# Altium PCB PCB1.PcbDoc
Units mm, origin at the board's own origin, x right, y up, seen from the top; angles counter-clockwise.
Board outline 75 x 55 mm, 2 copper layers (Top Layer, Bottom Layer); 36 components, 22 nets, 124 pads, 84 vias.
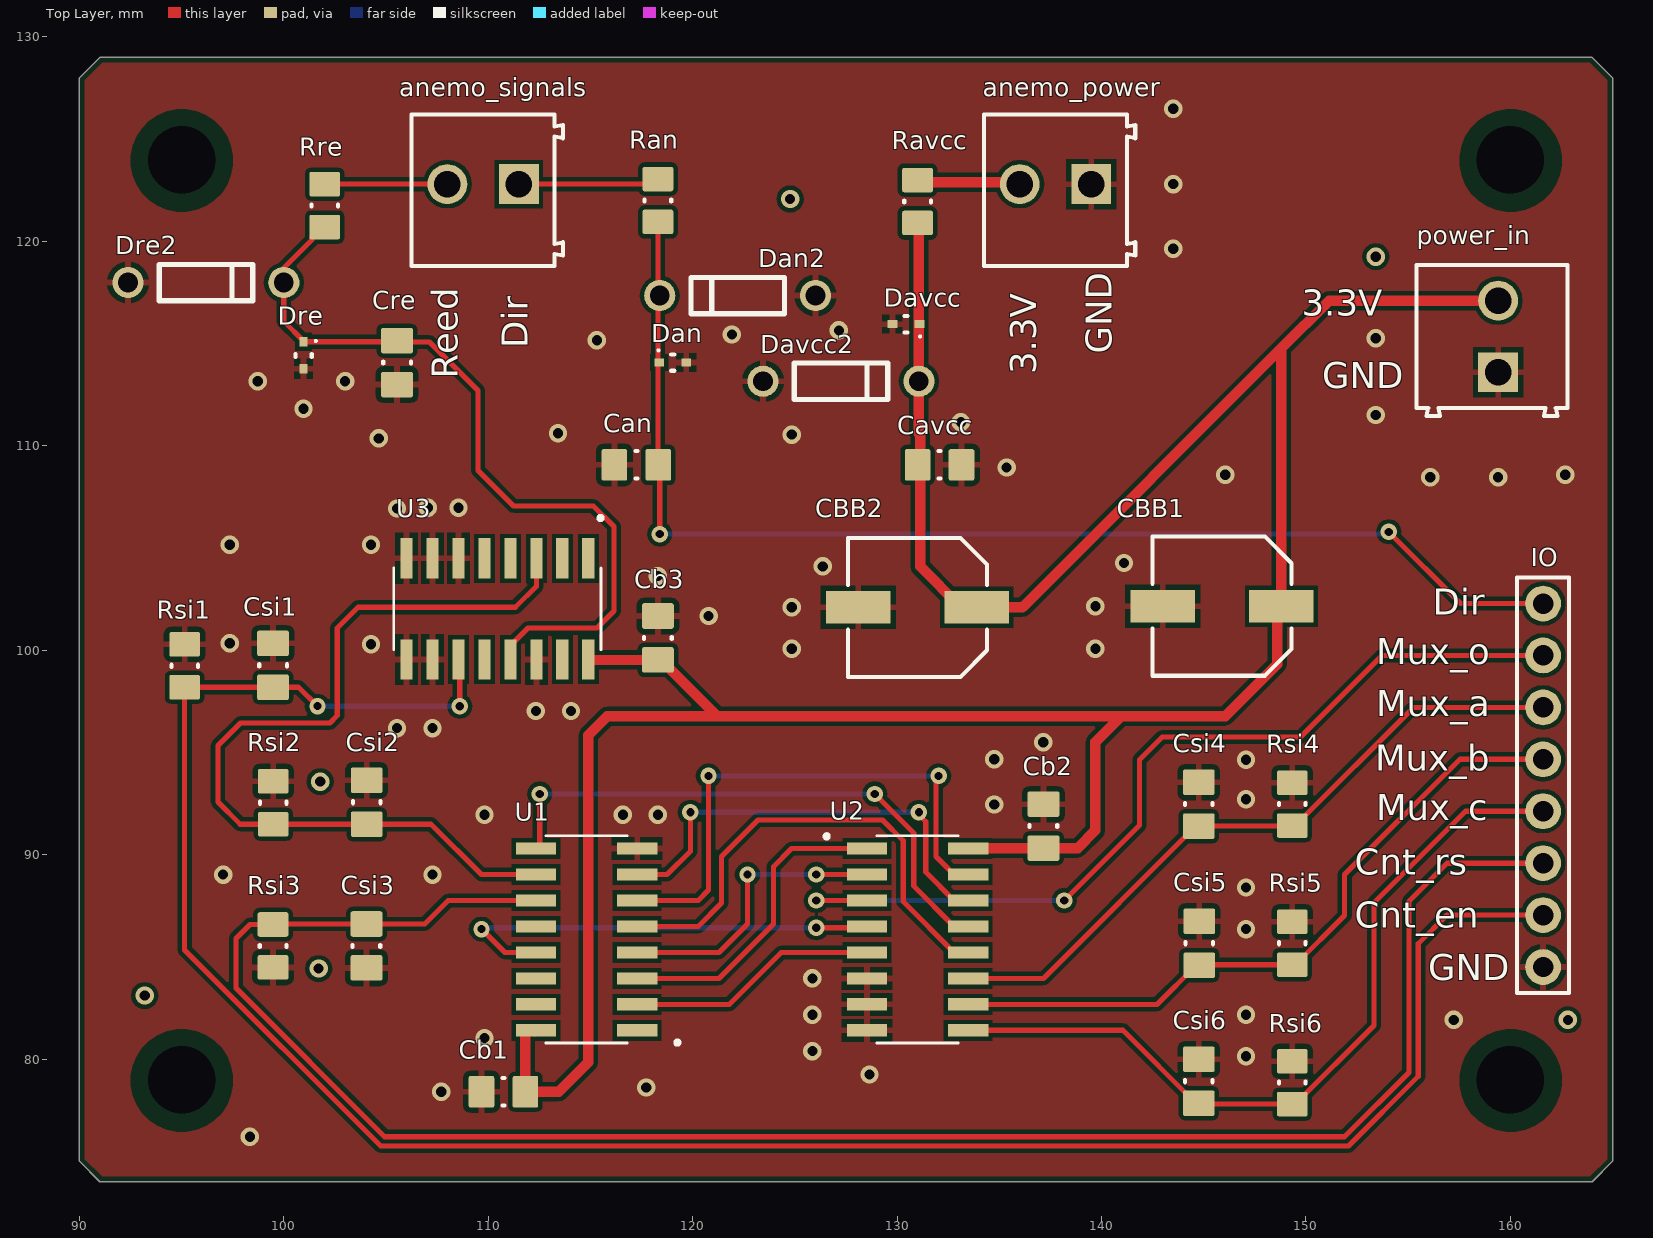
[diagram p0: Top Layer view]
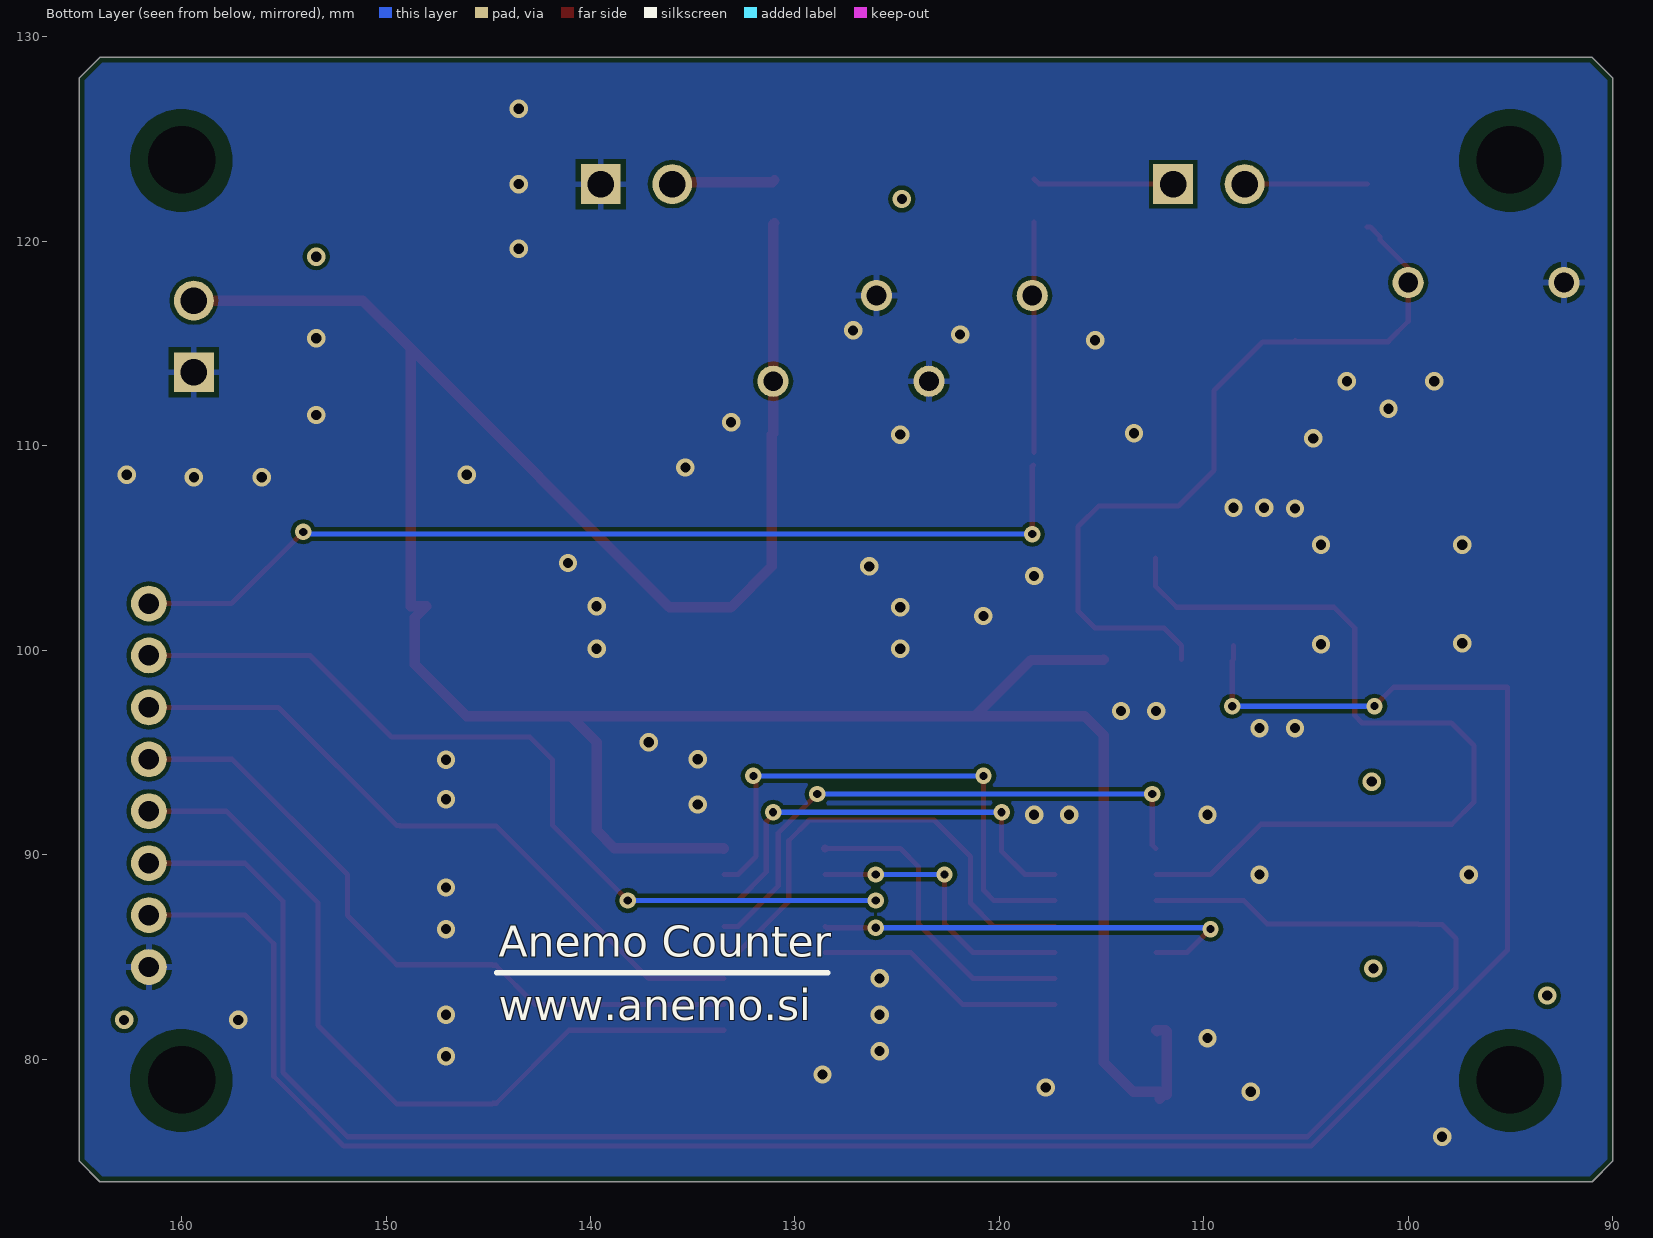
[diagram p1: Bottom Layer view, seen from below]

## Layer stack, top to bottom
Top Solder: solder mask 0.0102, Solder Resist, Dk 3.5
Top Layer: signal copper 0.0356
Dielectric 1: dielectric 0.32, FR-4, Dk 4.8
Bottom Layer: signal copper 0.0356
Bottom Solder: solder mask 0.0102, Solder Resist, Dk 3.5

## Board outline
90,75 91,74 164,74 165,75 165,128 164,129 91,129 90,128

## Design rules (kind name [scope] priority, off if disabled: settings)
BoardOutlineClearance [All] p1: gap=0.254 ignorepadtopadclearanceinfootprint=FALSE except(0: Arc-SplitContinuation Track-SplitContinuation SMDPad-SplitContinuation THPad-SplitContinuation Via-SplitContinuation Fill-SplitContinuation Poly-SplitContinuation Region-SplitContinuation Text-SplitContinuation)
Clearance Clearance_GND [(InNamedPolygon('Bottom Layer-No Net'))] p1: gap=0.254 ignorepadtopadclearanceinfootprint=FALSE except(0: Arc-Hole Track-Hole SMDPad-Hole THPad-Hole Via-Hole Fill-Hole Poly-Hole Region-Hole Text-Hole)
Clearance [All] p2: gap=0.203 ignorepadtopadclearanceinfootprint=FALSE
Height [All] p1: minheight=-1 maxheight=50 prefheight=12.7
HoleSize [All] p1: absolutevalues=TRUE maxlimit=6.3 minlimit=0.2 maxpercent=80.000 minpercent=20.000
HoleToHoleClearance [All] p1: gap=0.203 allowstackedmicrovias=TRUE
MinimumAnnularRing [All] p1: minimumring=0.127
MinimumSolderMaskSliver [All] p1: minsoldermaskwidth=0.076
PolygonConnect PolygonConnect_via [IsVia] p1: connectstyle=Direct reliefconductorwidth=0.254 reliefentries=4 polygonreliefangle="90 Angle" airgapwidth=0.254
PolygonConnect [All] p2: connectstyle=Relief reliefconductorwidth=0.305 reliefentries=4 polygonreliefangle="90 Angle" airgapwidth=0.254
RoutingVias [All] p1: holewidth=0.5 width=0.9 viastyle="Through Hole" minholewidth=0.4 minwidth=0.8 maxholewidth=0.7 maxwidth=1.2
ShortCircuit ShortCircuit_GND [InNet('AGND') OR InNet('GND') OR InNet('QGND') OR InNet('REF_GND') vs InNet('AGND') OR InNet('GND') OR InNet('QGND') OR InNet('REF_GND')] p1: allowed=TRUE
ShortCircuit [All] p2: allowed=FALSE
SilkToSilkClearance [All] p1: silktosilkclearance=0.102
SilkToSolderMaskClearance SilkscreenOverComponentPads [IsPad] p1: minsilkscreentomaskgap=0.05 clearancetoexposedcopper=TRUE
SolderMaskExpansion [All] p1: expansion=0.102
Width [All] p1: maxlimit=0.508 minlimit=0.254 preferedwidth=0.381
23 further rules are at their usual default settings.

## Components (designator, comment, footprint, x,y, rotation, side; value= is the part's Value field where it differs from the comment)
anemo_power "691214110002" 691214110002 137.75,122.5 r180 top
anemo_signals "691214110002" 691214110002 109.75,122.5 r180 top
Can "1nF" C0805(2012)_M 117.246,109.068 r180 top
Cavcc "1nF" C0805(2012)_M 132.075,109.068 r0 top
Cb1 "100nF" C0805(2012)_M 110.744,78.4 r180 top
Cb2 "100nF" C0805(2012)_M 137.16,91.397 r90 top
Cb3 "100nF" C0805(2012)_M 118.3,100.6 r90 top
CBB1 "10uF" C-SMD-ELKO-D 145.9,102.154 r180 top (schematic designator Cbb1)
CBB2 "100uF" C-SMD-ELKO-D 131,102.1 r180 top (schematic designator Cbb2)
Cre "1nF" C0805(2012)_M 105.537,114.071 r270 top
Csi1 "100pF" C0805(2012)_M 99.472,99.264 r90 top
Csi2 "100pF" C0805(2012)_M 104.053,92.567 r90 top
Csi3 "100pF" C0805(2012)_M 104.044,85.534 r270 top
Csi4 "100pF" C0805(2012)_M 144.758,92.472 r90 top
Csi5 "100pF" C0805(2012)_M 144.783,85.668 r90 top
Csi6 "100pF" C0805(2012)_M 144.758,78.918 r90 top
Dan "ESD5Z3.3T1G" ONSC-SOD-523-2-502-01_V 119.024,114.071 r0 top
Dan2 "BZX85C3V3" "DO 35 (300MILS)" 126.009,117.348 r180 top
Davcc "ESD5Z3.3T1G" ONSC-SOD-523-2-502-01_V 130.429,115.951 r180 top
Davcc2 "BZX85C3V3" "DO 35 (300MILS)" 123.444,113.157 r0 top
Dre "ESD5Z3.3T1G" ONSC-SOD-523-2-502-01_V 100.965,114.427 r270 top
Dre2 "BZX85C3V3" "DO 35 (300MILS)" 92.38,117.983 r0 top
IO "H1x8" H1x8 161.6,102.284 r90 top
power_in "691214110002" 691214110002 159.1,115.35 r90 top
Ran "220" R0805(2012)_M 118.3,122 r270 top
Ravcc "2.2" R0805(2012)_M 131,121.95 r270 top
Rre "220" R0805(2012)_M 102,121.75 r270 top
Rsi1 "10k" R0805(2012)_M 95.148,99.239 r90 top
Rsi2 "10k" R0805(2012)_M 99.481,92.542 r90 top
Rsi3 "10k" R0805(2012)_M 99.472,85.534 r270 top
Rsi4 "10k" R0805(2012)_M 149.33,92.472 r90 top
Rsi5 "10k" R0805(2012)_M 149.33,85.668 r90 top
Rsi6 "10k" R0805(2012)_M 149.33,78.848 r90 top
U1 "CD4040BE" *SOIC16 114.808,85.852 r180 top
U2 "CD4051BE" *SOIC16 130.999,85.852 r0 top
U3 "CD4051BE" *SOIC16 110.45,102.021 r270 top

## Footprints (in the part's own frame and the unit in brackets; to place one, negate y for a bottom-side part, rotate by r counter-clockwise, add the part's x,y. Pads: shape width x height; smd on the part's side, far side on the other; paste and mask are expansions set on the pad)
691214110002 [mm] "3.50 mm Horizontal Entry Modular, 2p"
  rect 1.95x1.95 hole 1.3: 1(-1.75,-0.3)
  round 1.95 hole 1.3: 2(1.75,-0.3)
  silkscreen extent -3.9,-3.7 3.5,3.7, body extent -3.95,-3.7 3.5,3.7, height 8.55
*SOIC16 [mm]
  rect 1.97x0.6 smd: 1(-2.475,4.445) 2(-2.475,3.175) 3(-2.475,1.905) 4(-2.475,0.635) 5(-2.475,-0.635) 6(-2.475,-1.905) 7(-2.475,-3.175) 8(-2.475,-4.445) 9(2.475,-4.445) 10(2.475,-3.175) 11(2.475,-1.905) 12(2.475,-0.635) 13(2.475,0.635) 14(2.475,1.905) 15(2.475,3.175) 16(2.475,4.445)
  silkscreen extent -4.54,-5.06 2,5.14
C0805(2012)_M [mm] "Chip Capacitor, 2-Leads, Body 2.05x1.25mm, IPC Low Density"
  rrect15% 1.25x1.55 smd: 1(-1.075,0) 2(1.075,0)
  silkscreen extent -0.05,-0.67 0.05,0.67, body extent -1.1,-0.7 1.1,0.7, height 1.4
C-SMD-ELKO-D [mm] "Aluminum Electrolytic Capacitor, Body 6.60x6.60x6.10mm, IPC Medium Density"
  rect 3.15x1.6 smd: 1(-2.9,0) 2(2.9,0)
  silkscreen extent -3.4,-3.4 3.4,3.4, body extent -3.5,-3.3 3.5,3.3, height 5.4
"DO 35 (300MILS)" [mil]
  round 60 hole 38: A(0,0) K(300,0)
  silkscreen extent 60,-35 240,35, body extent 3,-40 299,38, height 79
H1x8 [mm]
  round 1.75 hole 1: 1(0,0) 2(-2.54,0) 3(-5.08,0) 4(-7.62,0) 5(-10.16,0) 6(-12.7,0) 7(-15.24,0) 8(-17.78,0)
  silkscreen extent -19.05,-1.27 1.27,1.27, body extent -19.05,-1.27 1.27,1.27, height 8.4
ONSC-SOD-523-2-502-01_V [mm] "SOD, 2-Leads, Body 1.2x0.8mm"
  rect 0.48x0.4 smd: 1(-0.66,0) 2(0.66,0)
  silkscreen extent -0.75,-0.4 0.07,0.65, body extent -0.6,-0.4 0.6,0.4, height 0.7
R0805(2012)_M [mm] "Chip Resistor, 2-Leads, Body 2.05x1.25mm, IPC Low Density"
  rrect15% 1.2x1.5 smd: 1(-1.05,0) 2(1.05,0)
  silkscreen extent -0.05,-0.65 0.05,0.65, body extent -1.1,-0.7 1.1,0.7, height 0.8

## Part data
anemo_power anemo_signals power_in: "Serie 2141 - 3.50 mm Horizontal Entry Modular with Rising Cage Clamp WR-TBL, 2 pin", Operating Temperature="-40 to 105 degC", ComponentLink1Description=Manufacturer, ComponentLink1URL=http://www.we-online.de, ComponentLink2Description=Datasheet, ComponentLink2URL=http://katalog.we-online.de/em/datasheet/6912141100xx.pdf, Mounting Technology=THT, Packaging=Box, Part Number=691214110002, Pin Number=2, Pitch="3.50 mm", Published Date="June 2018", Publisher="Wurth Elektronik"
Can Cavcc Cb1 Cb2 Cb3 Cre Csi1 Csi2 Csi3 Csi4 Csi5 Csi6: library part C, "Capacitor"
CBB1 CBB2: library part C+, "Capacitor Polarized"
Dan Davcc Dre: "Transient Voltage Suppressor, Micro-Packaged Diode for ESD Protection, 2-Pin SOD-523, Pb-Free, Tape and Reel", Manufacturer="On Semiconductor", Supplier Part Number 1=ESD5Z3.3T1GOSTR-ND, ComponentLink1Description="Manufacturer URL", ComponentLink1URL=http://www.onsemi.com/, ComponentLink2Description=Datasheet, ComponentLink2URL=http://www.onsemi.cn/pub_link/Collateral/ESD5Z2.5T1-D.PDF, ComponentLink3Description="Package Specification", ComponentLink3URL=http://www.onsemi.com/pub_link/Collateral/502-01.PDF, DatasheetVersion="Rev. 10", Direction=Unidirectional, IR Max (uA)=0.05, Mounting Technology="Surface Mount", Number of Lines=1, PackageDescription="2-Pin SOD, Body 1.2 x 0.8 mm", PackageReference=SOD-523-2-502-01, PackageVersion="Rev. E, 09/2010", Packing="Tape and Reel", PartNumber=ESD5Z3.3T1G, PPK Max (W)=158, RoHS=Pb-Free, Supplier 1=Digi-Key, Supplier 2=Digi-Key, Supplier 3=Digi-Key, Supplier 4=Farnell, Supplier 5=Farnell, Supplier 6=Newark, Supplier 7=Newark, Supplier 8=Mouser, Supplier Part Number 2=ESD5Z3.3T1GOSCT-ND, Supplier Part Number 3=ESD5Z3.3T1GOSDKR-ND, Supplier Part Number 4=2317508, Supplier Part Number 5=2317778, Supplier Part Number 6=41K9783, Supplier Part Number 7=10N9403, Supplier Part Number 8=863-ESD5Z3.3T1G, V(BR) Min (V)=5, VRWM Max (V)=3.3
IO: "Header 1x8 (male)"
Ran Ravcc Rre Rsi1 Rsi2 Rsi3 Rsi4 Rsi5 Rsi6: library part R, "R"
U1: "Ic Counter Ripple Binary 12 Stage 16dil-300", Package="PDIP-16 Texas Instruments", Availability=Unavailable, MF="Texas Instruments", MP=CD4040BE, Price=None, SnapEDA_Link=https://www.snapeda.com/parts/CD4040BE/Texas%20Instruments/view-part/?ref=snap
U2 U3: "i/c Analg Mx/Dmx 8chan 4051_p_", Package="DIP-16 Intersil", Availability=Unavailable, MF="Texas Instruments", MP=CD4051BE, Price=None, SnapEDA_Link=https://www.snapeda.com/parts/CD4051BE/Texas%20Instruments/view-part/?ref=snap

## Free pads (board coordinates)
  round 1.524 hole 3.3 unplated: 5(95,124) 5(95,79) 5(160,124) 5(160,79)

## Via types
v1: diameter 0.9, hole 0.5, Top Layer to Bottom Layer, 68 vias
v2: diameter 0.8, hole 0.4, Top Layer to Bottom Layer, 16 vias

## Nets (pads, with @x,y where several pads share a name; then routed paths per layer and width w, separated by ;. In a path a pad name is that pad's centre, name@x,y a point inside that pad or via, vN(x,y) a via of type N, cw(c..) or ccw(c..) an arc to the next point about the centre after c; other vN are vias at no path point)
anemo_analog: Can.1 Dan2.K Dan.1 IO.1 Ran.2 | length 59.5
  Top Layer w0.254: Can.1@118.3,109.677 Ran.2 ; Can.1 118.387,109.002 v2(118.387,105.681) ; v2(154.051,105.791) 157.558,102.284 IO.1
  Bottom Layer w0.254: v2@118.3,105.681 v2(118.387,105.681) 153.941,105.681 v2(154.051,105.791)
anemo_analog_raw: anemo_signals.1 Ran.1 | length 6.9
  Top Layer w0.254: anemo_signals.1 118.05,122.8 Ran.1
anemo_reed: Cre.1 Dre2.K Dre.1 Rre.2 U3.13 | length 39.8
  Top Layer w0.254: Rre.2 101.85,120.7 101.377,120.227 101.377,120.077 100,118.7 Dre2.K 100,116.092 100.965,115.127 Dre.1 104.488,115.087 ; Cre.1 105.477,115.087 104.488,115.087 ; U3.13 111.085,100.231 111.946,101.092 115.316,101.092 116.15,101.926 116.15,106.049 115.138,107.061 111.238,107.061 109.499,108.8 109.499,112.7 107.124,115.075 104.5,115.075 104.488,115.087
anemo_reed_raw: anemo_signals.2 Rre.1 | length 6
  Top Layer w0.254: Rre.1 anemo_signals.2
anemo_vcc: anemo_power.2 Ravcc.1 | length 5.1
  Top Layer w0.508: Ravcc.1 131.1,122.9 135.9,122.9 anemo_power.2
cnt_en: Csi1.1 IO.7 Rsi1.1 U3.11 | length 108.6
  Top Layer w0.254: v2(101.648,97.265) 100.724,98.189 Csi1.1 Rsi1.1 95.148,85.341 104.743,75.746 152.08,75.746 155.491,79.157 155.491,85.641 156.894,87.044 IO.7 ; U3.11@108.545,100.231 U3.11 108.61,99.481 v2(108.61,97.257)
  Bottom Layer w0.254: v2(101.648,97.265) 101.656,97.257 v2(108.61,97.257)
cnt_in: Csi2.1 Rsi2.1 U1.10 U3.3 | length 42.5
  Top Layer w0.254: U1.10 109.669,89.027 107.204,91.492 Csi2.1 Rsi2.1 97.865,91.492 96.774,92.583 96.774,95.337 97.881,96.444 102.255,96.444 102.616,96.805 102.616,101.092 103.624,102.1 111.325,102.1 112.355,103.13 U3.3
cnt_rst: Csi3.1 IO.6 Rsi3.1 U1.11 | length 95.3
  Top Layer w0.254: U1.11 108.045,87.757 106.897,86.609 Csi3.1 99.497,86.609 Rsi3.1 98.341,86.584 97.663,85.906 97.663,83.473 104.933,76.203 151.891,76.203 155.034,79.347 155.034,87.724 156.894,89.584 IO.6
GND: anemo_power.1 Can.2 Cavcc.2 Cb1.2 Cb2.2 Cb3.2 CBB1.2 CBB2.2 Cre.2 Csi1.2 Csi2.2 Csi3.2 Csi4.2 Csi5.2 Csi6.2 Dan2.A Dan.2 Davcc2.A Davcc.2 Dre2.A Dre.2 IO.8 power_in.1 Rsi1.2 Rsi2.2 Rsi3.2 Rsi4.2 Rsi5.2 Rsi6.2 U1.8 U2.6 U2.7 U2.8 U3.6 U3.7 U3.8 U3.9 U3.10 U3.14
  other v1: 98.341,76.2 107.696,78.4 117.729,78.613 128.651,79.248 147.066,80.137 125.857,80.391 109.815,81.026 157.226,81.915 125.857,82.169 147.066,82.169 125.857,83.947 147.066,86.36 147.066,88.392 97.028,89.027 107.275,89.027 109.815,91.948 116.586,91.948 118.3,91.948 134.747,92.456 147.066,92.71 147.066,94.646 134.747,94.664 137.148,95.504 105.537,96.19 107.275,96.19 112.333,97.028 114.046,97.028 124.841,100.076 139.7,100.076 104.267,100.289 97.358,100.339 120.777,101.675 124.841,102.1 139.7,102.154 118.3,103.632 126.365,104.1 141.097,104.267 97.358,105.156 104.267,105.156 105.537,106.934 107.048,106.974 108.545,106.974 156.083,108.458 159.4,108.458 146.05,108.585 162.687,108.585 135.357,108.941 104.648,110.363 124.841,110.55 113.411,110.612 133.121,111.15 153.416,111.506 100.965,111.811 98.73,113.157 102.997,113.157 115.316,115.16 153.416,115.265 121.92,115.443 127.152,115.646 143.51,119.634 143.51,122.8 143.51,126.492
mux_a: Csi4.1 IO.3 Rsi4.1 U2.11 | length 33.6
  Top Layer w0.254: U2.11 137.158,83.947 144.608,91.397 Csi4.1 149.305,91.397 Rsi4.1 149.48,91.422 155.262,97.204 IO.3
mux_b: Csi5.1 IO.4 Rsi5.1 U2.10 | length 34.3
  Top Layer w0.254: U2.10 142.717,82.677 144.633,84.593 Csi5.1 144.808,84.618 Rsi5.1 149.48,84.618 151.892,87.03 151.892,89.027 157.529,94.664 IO.4
mux_c: Csi6.1 IO.5 Rsi6.1 U2.9 | length 39.1
  Top Layer w0.254: U2.9 141.044,81.407 144.608,77.843 Csi6.1 144.803,77.798 Rsi6.1 149.48,77.798 153.329,81.648 153.329,87.651 157.802,92.124 IO.5
mux_out: IO.2 U2.3 | length 44.9
  Top Layer w0.254: v2(126.047,87.757) U2.3 ; v2(138.176,87.757) 141.859,91.44 141.859,94.646 142.971,95.758 149.733,95.758 153.719,99.744 IO.2
  Bottom Layer w0.254: v2(126.047,87.757) v2(138.176,87.757)
NetU1_2: U1.2 U2.5 | length 12.3
  Top Layer w0.254: U1.2 121.793,82.677 124.333,85.217 U2.5
NetU1_3: U1.3 U2.1 | length 15.5
  Top Layer w0.254: U1.3 121.285,83.947 123.952,86.614 123.952,89.408 124.841,90.297 128.499,90.297 U2.1@128.512,90.309
  Top Layer w0.381: U2.1@128.512,90.309 U2.1
NetU1_4: U1.4 U2.2 | length 14.2
  Top Layer w0.254: U1.4 121.285,85.217 122.682,86.614 v2(122.682,89.027) ; v2(126.047,89.027) U2.2
  Bottom Layer w0.254: v2(122.682,89.027) v2(126.047,89.027)
NetU1_5: U1.5 U2.12 | length 24.1
  Top Layer w0.254: U1.5 120.269,86.487 121.412,87.63 121.412,89.916 123.19,91.694 129.286,91.694 130.3,90.68 130.3,87.706 132.789,85.217 U2.12
NetU1_6: U1.6 U2.15 | length 26.5
  Top Layer w0.254: U1.6 120.269,87.757 120.777,88.265 v2(120.777,93.853) ; v2(132.029,93.853) 131.9,93.724 131.9,89.916 132.789,89.027 U2.15
  Bottom Layer w0.254: v2(120.777,93.853) v2(132.029,93.853)
NetU1_7: U1.7 U2.14 | length 21.9
  Top Layer w0.254: U1.7 118.748,89.027 119.888,90.167 v2(119.888,92.075) ; v2(131.064,92.075) 131.064,91.948 131.4,91.612 131.4,89.146 132.789,87.757 U2.14
  Bottom Layer w0.254: v2(119.888,92.075) v2(131.064,92.075)
NetU1_9: U1.9 U2.13 | length 27.9
  Top Layer w0.254: U1.9 112.349,90.297 112.522,90.47 v2(112.522,92.964) ; v2(128.905,92.964) 130.81,91.059 130.81,88.466 132.789,86.487 U2.13
  Bottom Layer w0.254: v2(112.522,92.964) v2(128.905,92.964)
NetU1_13: U1.13 U2.4 | length 22
  Top Layer w0.254: v2(109.669,86.36) 110.812,85.217 U1.13 ; v2(126.046,86.422) 126.047,86.423 128.46,86.423 U2.4
  Bottom Layer w0.254: v2(109.669,86.36) 109.731,86.422 v2(126.046,86.422)
VCC: Cavcc.1 Cb1.1 Cb2.1 Cb3.1 CBB1.1 CBB2.1 Davcc2.K Davcc.1 power_in.2 Ravcc.2 U1.16 U2.16 U3.16 | length 147.8
  Top Layer w0.508: Cb1.1@112.154,78.065 Cb1.1@111.894,78.325 ; U1.16@112.287,81.361 U1.16 111.865,81.407 111.819,81.361 Cb1.1 ; U3.16 114.916,99.525 Cb3.1 118.45,99.525 121.201,96.774 ; Ravcc.2 131.063,120.837 131.063,117.627 131.063,117.323 131.063,116.942 131.063,115.951 131.063,115.65 131.063,113.589 131.063,112.776 131.063,110.612 131.125,110.55 131.125,109.068 131.125,104.1 133.125,102.1 CBB2.1 136.136,102.1 148.8,114.764 ; U2.16 133.486,90.309 137.148,90.309 Cb2.1 138.836,90.322 139.7,91.186 139.7,95.504 140.97,96.774 ; power_in.2 151.136,117.1 148.8,114.764 ; Cb1.1 Cb1.1@111.894,78.325 ; Cb1.1 111.819,78.25 Cb1.1@111.894,78.325 ; Cb1.1@111.894,78.325 111.969,78.4 113.446,78.4 114.895,79.849 114.895,95.845 115.824,96.774 121.201,96.774 ; 121.201,96.774 140.97,96.774 ; 140.97,96.774 146.05,96.774 148.59,99.314 148.59,101.589 148.025,102.154 CBB1.1 148.8,114.764
pads on no net: U1.1 U1.12 U1.14 U1.15 U3.1 U3.2 U3.4 U3.5 U3.12 U3.15
copper on no net:
  other v1: 162.814,81.915 93.193,83.109 101.702,84.43 101.778,93.574 153.416,119.253 124.765,122.072

## Polygon pours and split planes (outlines as drawn)
GND on Bottom Layer "GND-bottom" (solid, pour order 3): 90,75 91,74 164,74 165,75 165,128 164,129 91,129 90,128
GND on Top Layer "GND-top" (solid, pour order 1): 90,75 91,74 164,74 165,75 165,128 164,129 91,129 90,128

## Other copper
Top Layer:
  pour cut-out: 157.512,123.952 ccw(c160.012,123.952) 160.012,121.452 ccw(c160.012,123.952) 162.512,123.952 ccw(c160.012,123.952) 160.012,126.452 ccw(c160.012,123.952)
  pour cut-out: 92.512,123.952 ccw(c95.012,123.952) 95.012,121.452 ccw(c95.012,123.952) 97.512,123.952 ccw(c95.012,123.952) 95.012,126.452 ccw(c95.012,123.952)
  pour cut-out: 92.512,78.952 ccw(c95.012,78.952) 95.012,76.452 ccw(c95.012,78.952) 97.512,78.952 ccw(c95.012,78.952) 95.012,81.452 ccw(c95.012,78.952)
  pour cut-out: 157.512,78.952 ccw(c160.012,78.952) 160.012,76.452 ccw(c160.012,78.952) 162.512,78.952 ccw(c160.012,78.952) 160.012,81.452 ccw(c160.012,78.952)
Bottom Layer:
  pour cut-out: 157.512,123.952 ccw(c160.012,123.952) 160.012,121.452 ccw(c160.012,123.952) 162.512,123.952 ccw(c160.012,123.952) 160.012,126.452 ccw(c160.012,123.952)
  pour cut-out: 92.512,123.952 ccw(c95.012,123.952) 95.012,121.452 ccw(c95.012,123.952) 97.512,123.952 ccw(c95.012,123.952) 95.012,126.452 ccw(c95.012,123.952)
  pour cut-out: 92.512,78.952 ccw(c95.012,78.952) 95.012,76.452 ccw(c95.012,78.952) 97.512,78.952 ccw(c95.012,78.952) 95.012,81.452 ccw(c95.012,78.952)
  pour cut-out: 157.512,78.952 ccw(c160.012,78.952) 160.012,76.452 ccw(c160.012,78.952) 162.512,78.952 ccw(c160.012,78.952) 160.012,81.452 ccw(c160.012,78.952)

## Silkscreen, mask and mechanical layers (free items; w line width, h text height)
Top Overlay:
  text "3.3V" at 149.793,116.352 h1.27
  text "Dir" at 111.921,114.77 h1.27 r90
  text "GND" at 140.5,114.497 h1.27 r90
  text "3.3V" at 136.8,113.497 h1.27 r90
  text "Reed" at 108.52,113.273 h1.27 r90
  text "GND" at 150.8,112.827 h1.27
  text "Dir" at 156.191,101.727 h1.27
  text "Mux_o" at 153.446,99.314 h1.27
  text "Mux_a" at 153.446,96.774 h1.27
  text "Mux_b" at 153.397,94.107 h1.27
  text "Mux_c" at 153.446,91.694 h1.27
  text "Cnt_rs" at 152.381,89.027 h1.27
  text "Cnt_en" at 152.381,86.423 h1.27
  text "GND" at 155.981,83.845 h1.27
Bottom Overlay:
  lines w0.254: 128.382,84.226 144.587,84.226
  text "Anemo Counter" at 144.485,85.012 h1.52
  text "www.anemo.si" at 144.485,81.89 h1.52
Mechanical 1:
  the board outline again, w0.508